# EAGLE board debugBoard (EAGLE 8.3.2)
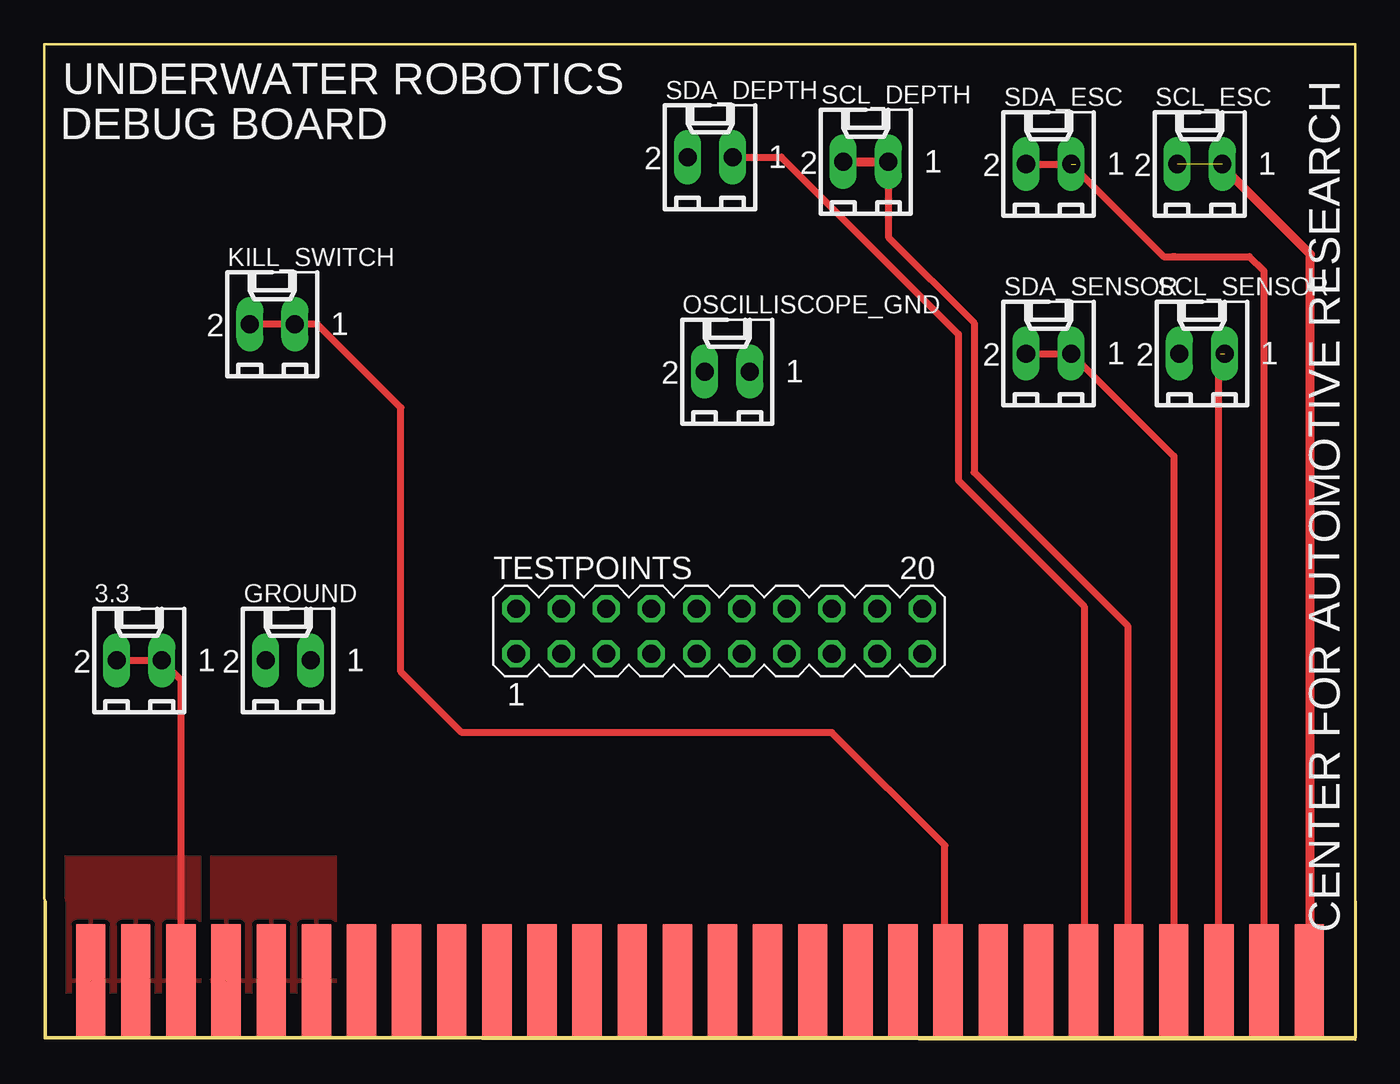
[diagram p0: board, top side]
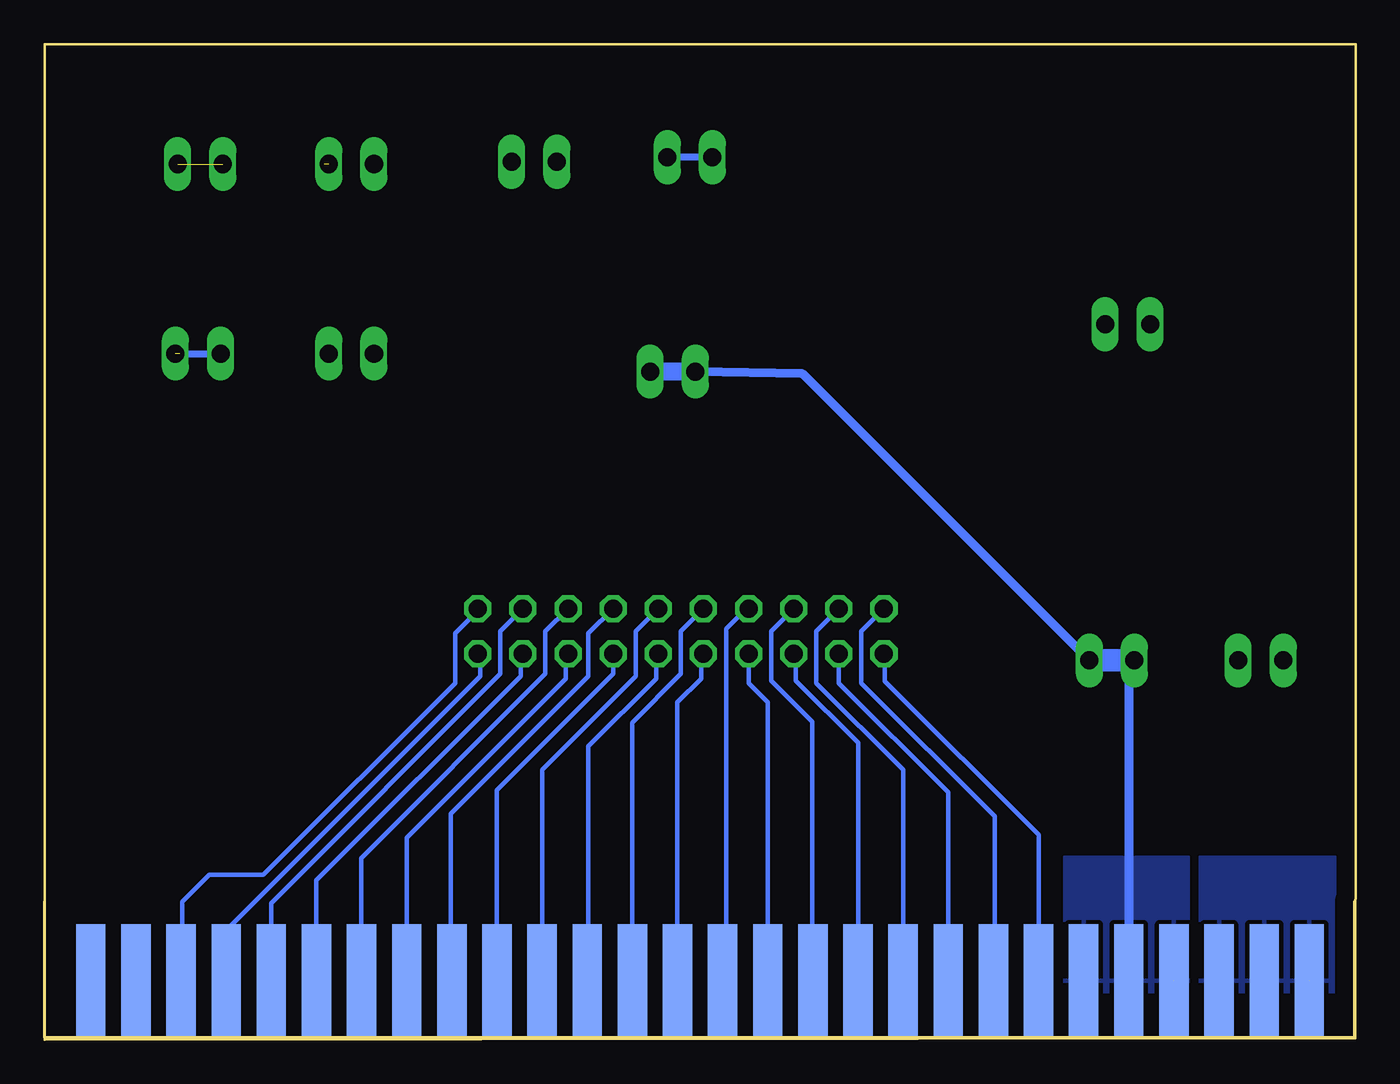
[diagram p1: board, bottom side, seen from below]

Size 73.79 x 56.01 mm. Coordinates in mm from the lower left corner, seen from the top.
Outline: 0.01,0.08 73.78,0 73.78,7.8 73.79,7.93 73.79,56.01 0,56.01 0,7.93 0.01,7.88 0.01,0.08
Copper layers (1*16): Top 0.035mm / dielectric 1.5mm / Bottom 0.035mm
Design rules "battery_balancer": minimum track width 6mil, minimum drill 0.35mm, track to track 0.205mm, track to pad 0.205mm, pad to pad 0.205mm, via to via 0.205mm, smd to smd 6mil, copper to edge 40mil, drill to drill 6mil, minimum pad ring 10mil, minimum via ring 8mil, stop-mask expansion 4mil, vias tented up to drill 0mil, thermal gap 10mil

## Footprints (pad centres in the part's own frame; a part is rotated, then mirrored left to right if it is on the bottom)
6410-02 = drill 1.016 long: 1 1.27,0; 2 -1.27,0
MA10-2 = drill 1.016 octagon: 1 -11.43,-1.27; 2 -11.43,1.27; 3 -8.89,-1.27; 4 -8.89,1.27; 5 -6.35,-1.27; 6 -6.35,1.27; 7 -3.81,-1.27; 8 -3.81,1.27; 9 -1.27,-1.27; 10 -1.27,1.27; 11 1.27,-1.27; 12 1.27,1.27; 13 3.81,-1.27; 14 3.81,1.27; 15 6.35,-1.27; 16 6.35,1.27; 17 8.89,-1.27; 18 8.89,1.27; 19 11.43,-1.27; 20 11.43,1.27
5530843-6-BOARDFINGERS = smd 1.651 x 6.35 bottom: 3.3V_4 0.826,3.175; 3.3V_5 3.365,3.175; 3.3V_6 5.905,3.175; EXTRA1 16.066,3.175; EXTRA2 18.605,3.175; EXTRA3 21.145,3.175; EXTRA4 23.686,3.175; EXTRA5 26.226,3.175; EXTRA6 28.765,3.175; EXTRA7 31.305,3.175; EXTRA8 33.846,3.175; EXTRA9 36.386,3.175; EXTRA10 38.925,3.175; EXTRA11 41.465,3.175; EXTRA12 44.005,3.175; EXTRA13 46.545,3.175; EXTRA14 49.086,3.175; EXTRA15 51.626,3.175; EXTRA16 54.166,3.175; EXTRA17 56.706,3.175; EXTRA18 59.245,3.175; EXTRA19 61.785,3.175; EXTRA20 64.326,3.175; EXTRA21 66.865,3.175; EXTRA22 69.406,3.175; GND_4 8.445,3.175; GND_5 10.986,3.175; GND_6 13.525,3.175 | smd 1.651 x 6.35: 3.3VP1 0.826,3.175; 3.3VP2 3.365,3.175; 3.3VP3 5.905,3.175; CAN_H 51.626,3.175; CAN_L 54.166,3.175; EXTRA23 16.066,3.175; EXTRA24 18.605,3.175; EXTRA25 21.145,3.175; EXTRA26 23.686,3.175; EXTRA27 26.226,3.175; EXTRA28 28.765,3.175; EXTRA29 31.305,3.175; EXTRA30 33.846,3.175; EXTRA31 36.386,3.175; EXTRA32 38.925,3.175; EXTRA33 41.465,3.175; EXTRA34 44.005,3.175; EXTRA35 46.545,3.175; GND1 8.445,3.175; GND2 10.986,3.175; GND3 13.525,3.175; KILL_SWITCH 49.086,3.175; SCL_DEPTH 59.245,3.175; SCL_ESC 69.406,3.175; SCL_SENSOR 64.326,3.175; SDA_DEPTH 56.706,3.175; SDA_ESC 66.865,3.175; SDA_SENSOR 61.785,3.175

## Placement (x,y rotation side)
3.3  22-27-2021-02  [6410-02]  5.33,21.34 0 top
GROUND  22-27-2021-02  [6410-02]  13.72,21.34 0 top
KILL_SWITCH  22-27-2021-02  [6410-02]  12.83,40.26 0 top
OSCILLISCOPE_GND  22-27-2021-02  [6410-02]  38.43,37.59 0 top
SCL_DEPTH  22-27-2021-02  [6410-02]  46.23,49.4 0 top
SCL_ESC  22-27-2021-02  [6410-02]  65.02,49.28 0 top
SCL_SENSOR  22-27-2021-02  [6410-02]  65.15,38.61 0 top
SDA_DEPTH  22-27-2021-02  [6410-02]  37.46,49.66 0 top
SDA_ESC  22-27-2021-02  [6410-02]  56.51,49.28 0 top
SDA_SENSOR  22-27-2021-02  [6410-02]  56.51,38.61 0 top
TESTPOINTS  [MA10-2]  37.97,22.99 0 top
U$1  5530843  [5530843-6-BOARDFINGERS]  1.78,0.13 0 top

## Library data of the parts
3.3 GROUND KILL_SWITCH OSCILLISCOPE_GND SCL_DEPTH SCL_ESC SCL_SENSOR SDA_DEPTH SDA_ESC SDA_SENSOR = con-molex; OC_FARNELL: unknown; OC_NEWARK: unknown
TESTPOINTS = con-lstb; OC_FARNELL: unknown; OC_NEWARK: unknown
U$1 = 5530843-6

## Nets
3.3V: 3.3.1 3.3.2 U$1.3.3V_4 U$1.3.3V_5 U$1.3.3V_6 U$1.3.3VP1 U$1.3.3VP2 U$1.3.3VP3
EXTRA1: TESTPOINTS.1 U$1.EXTRA1
EXTRA2: TESTPOINTS.2 U$1.EXTRA2
EXTRA3: TESTPOINTS.3 U$1.EXTRA3
EXTRA4: TESTPOINTS.4 U$1.EXTRA4
EXTRA5: TESTPOINTS.5 U$1.EXTRA5
EXTRA6: TESTPOINTS.6 U$1.EXTRA6
EXTRA7: TESTPOINTS.7 U$1.EXTRA7
EXTRA8: TESTPOINTS.8 U$1.EXTRA8
EXTRA9: TESTPOINTS.9 U$1.EXTRA9
EXTRA10: TESTPOINTS.10 U$1.EXTRA10
EXTRA11: TESTPOINTS.11 U$1.EXTRA11
EXTRA12: TESTPOINTS.12 U$1.EXTRA12
EXTRA13: TESTPOINTS.13 U$1.EXTRA13
EXTRA14: TESTPOINTS.14 U$1.EXTRA14
EXTRA15: TESTPOINTS.15 U$1.EXTRA15
EXTRA16: TESTPOINTS.16 U$1.EXTRA16
EXTRA17: TESTPOINTS.17 U$1.EXTRA17
EXTRA18: TESTPOINTS.18 U$1.EXTRA18
EXTRA19: TESTPOINTS.19 U$1.EXTRA19
EXTRA20: TESTPOINTS.20 U$1.EXTRA20
GND: GROUND.1 GROUND.2 OSCILLISCOPE_GND.1 OSCILLISCOPE_GND.2 U$1.GND1 U$1.GND2 U$1.GND3 U$1.GND_4 U$1.GND_5 U$1.GND_6
KILL_SWITCH: KILL_SWITCH.1 KILL_SWITCH.2 U$1.KILL_SWITCH
SCL_DEPTH: SCL_DEPTH.1 SCL_DEPTH.2 U$1.SCL_DEPTH
SCL_ESC: SCL_ESC.1 SCL_ESC.2 U$1.SCL_ESC
SCL_SENSOR: SCL_SENSOR.1 SCL_SENSOR.2 U$1.SCL_SENSOR
SDA_DEPTH: SDA_DEPTH.1 SDA_DEPTH.2 U$1.SDA_DEPTH
SDA_ESC: SDA_ESC.1 SDA_ESC.2 U$1.SDA_ESC
SDA_SENSOR: SDA_SENSOR.1 SDA_SENSOR.2 U$1.SDA_SENSOR

## Tracks (layer width: path | path; a pad name or v marks a point on that pad's centre or on a via)
3.3V  (1 unrouted)
  Top 0.406: 3.3.2 3.3.1 7.68,20.26 U$1.3.3VP3
  pour Top: 1.14,2.67 8.76,2.67 8.76,10.29 1.14,10.29
  pour Bottom: 1.14,10.29 8.76,10.29 8.76,2.67 1.14,2.67
EXTRA1
  Bottom 0.254: U$1.EXTRA1 17.84,11.52 26.49,20.17 26.49,21.67 TESTPOINTS.1
EXTRA2
  Bottom 0.254: TESTPOINTS.2 27.81,22.99 27.81,20.07 20.32,12.57 20.32,3.37
  Bottom 0.305: 20.32,3.37 U$1.EXTRA2
EXTRA3
  Bottom 0.254: TESTPOINTS.3 29.08,20.07 22.92,13.91 U$1.EXTRA3
  Bottom 0.305: U$1.EXTRA3 22.99,3.37
EXTRA4
  Bottom 0.254: TESTPOINTS.4 30.35,22.99 30.35,20.07 25.46,15.18 U$1.EXTRA4
  Bottom 0.305: U$1.EXTRA4 25.4,3.37
EXTRA5
  Bottom 0.254: TESTPOINTS.5 31.5,21.59 31.5,20.19 28,16.7 U$1.EXTRA5
  Bottom 0.305: U$1.EXTRA5 27.94,3.37
EXTRA6
  Bottom 0.254: TESTPOINTS.6 32.89,22.99 32.89,20.19 30.57,17.88 30.57,3.33
  Bottom 0.305: 30.61,3.37 30.57,3.33 U$1.EXTRA6
EXTRA7
  Bottom 0.254: TESTPOINTS.7 34.16,20.07 33.08,18.99 U$1.EXTRA7
EXTRA8
  Bottom 0.254: U$1.EXTRA8 35.43,3.49 35.43,23.11 34.29,24.26 TESTPOINTS.8
  Bottom 0.305: 35.69,3.37 U$1.EXTRA8
EXTRA9
  Bottom 0.254: TESTPOINTS.9 36.83,21.59 36.83,20.32 38.16,18.99 U$1.EXTRA9
  Bottom 0.305: U$1.EXTRA9 38.1,3.37
EXTRA10
  Bottom 0.254: TESTPOINTS.10 37.97,22.99 37.97,20.57 40.7,17.84 U$1.EXTRA10
  Bottom 0.305: U$1.EXTRA10 40.64,3.37
EXTRA11
  Bottom 0.254: TESTPOINTS.11 39.37,21.59 39.37,20.32 43.18,16.51 43.18,3.37
  Bottom 0.305: 43.18,3.37 U$1.EXTRA11
EXTRA12
  Bottom 0.254: TESTPOINTS.12 40.51,22.99 40.51,20.45 45.78,15.18 U$1.EXTRA12
  Bottom 0.305: U$1.EXTRA12 45.85,3.37
EXTRA13
  Bottom 0.254: TESTPOINTS.13 41.78,20.57 48.32,14.03 U$1.EXTRA13
  Bottom 0.305: U$1.EXTRA13 48.26,3.37
EXTRA14
  Bottom 0.254: TESTPOINTS.14 43.18,22.86 43.18,20.45 50.93,12.7 50.93,3.37
  Bottom 0.305: 50.8,3.37 U$1.EXTRA14 50.93,3.37
EXTRA15
  Bottom 0.254: TESTPOINTS.15 44.45,21.59 44.45,20.32 53.4,11.37 U$1.EXTRA15
  Bottom 0.305: U$1.EXTRA15 53.47,3.37
EXTRA16
  Bottom 0.254: TESTPOINTS.16 45.59,22.99 45.59,20.57 55.98,10.19 55.98,3.27
  Bottom 0.305: 55.88,2.67 56.13,2.41 56.13,3.11 55.98,3.27 U$1.EXTRA16
EXTRA17
  Bottom 0.254: TESTPOINTS.17 46.99,21.59 46.99,20.45 58.48,8.95 U$1.EXTRA17
  Bottom 0.305: 58.29,3.49 U$1.EXTRA17 58.55,3.37 58.55,4.06 58.04,4.57
EXTRA18
  Bottom 0.254: TESTPOINTS.18 48.13,22.99 48.13,20.57 61.02,7.68 U$1.EXTRA18
  Bottom 0.305: U$1.EXTRA18 60.71,3.62
EXTRA19
  Bottom 0.254: TESTPOINTS.19 49.28,21.59 49.28,20.45 63.56,6.16 U$1.EXTRA19
  Bottom 0.305: U$1.EXTRA19 63.25,3.62
EXTRA20
  Bottom 0.254: U$1.EXTRA20 66.04,3.37 66.04,7.75 64.52,9.27 61.47,9.27 50.67,20.07 50.67,22.86 49.4,24.13 TESTPOINTS.20
  Bottom 0.305: 65.53,3.87 U$1.EXTRA20
GND  (1 unrouted)
  Bottom 0.508: GROUND.2 12.76,21.02 U$1.GND2 | GROUND.1 31.12,37.47 OSCILLISCOPE_GND.2
  Bottom 1.016: OSCILLISCOPE_GND.2 OSCILLISCOPE_GND.1
  Bottom 1.27: GROUND.2 GROUND.1
  pour Top: 9.4,2.67 16.38,2.67 16.38,10.29 9.4,10.29
  pour Bottom: 9.4,10.29 16.38,10.29 16.38,2.67 9.4,2.67
KILL_SWITCH
  Top 0.406: 50.93,2.67 51.05,2.54 51.05,3.11 U$1.KILL_SWITCH 50.67,3.49 50.67,10.92 44.32,17.27 23.49,17.27 20.07,20.7 20.07,35.56 15.37,40.26 13.97,40.26 | 13.97,40.26 KILL_SWITCH.1 | 13.97,40.26 KILL_SWITCH.2
SCL_DEPTH
  Top 0.406: SCL_DEPTH.1 47.5,45.16 52.32,40.34 52.32,31.93 60.96,23.29 60.96,3.37 U$1.SCL_DEPTH
  Top 0.508: SCL_DEPTH.2 SCL_DEPTH.1
SCL_ESC  (1 unrouted)
  Top 0.508: U$1.SCL_ESC 71.25,3.37 71.25,44.2 66.29,49.15 SCL_ESC.1
SCL_SENSOR  (1 unrouted)
  Top 0.406: U$1.SCL_SENSOR 66.1,38.54 66.17,38.61
  Bottom 0.406: SCL_SENSOR.1 SCL_SENSOR.2
SDA_DEPTH
  Top 0.406: SDA_DEPTH.1 41.48,49.66 51.43,39.7 51.43,31.47 58.52,24.38 58.52,2.29 58.45,2.21 58.45,3.26 U$1.SDA_DEPTH
  Bottom 0.406: SDA_DEPTH.2 SDA_DEPTH.1
SDA_ESC  (1 unrouted)
  Top 0.406: 58.04,49.28 58.29,49.53 | U$1.SDA_ESC 68.64,43.24 67.82,44.07 63.63,44.07 | 63.63,44.07 63.5,44.07 | SDA_ESC.2 SDA_ESC.1 62.99,44.07 63.63,44.07
SDA_SENSOR
  Top 0.406: SDA_SENSOR.2 SDA_SENSOR.1 63.56,32.83 U$1.SDA_SENSOR

## Text on the board
tPlace: CENTER FOR AUTOMOTIVE RESEARCH | UNDERWATER ROBOTICS | DEBUG BOARD